# Altium PCB PCB-A6-2x2-V-CUT.PcbDoc
Units mm, origin at the board's own origin, x right, y up, seen from the top; angles counter-clockwise.
Board outline 146.6 x 116.6 mm, 2 copper layers (Top Layer, Bottom Layer); 8 components, 0 nets, 8 pads, 0 vias.
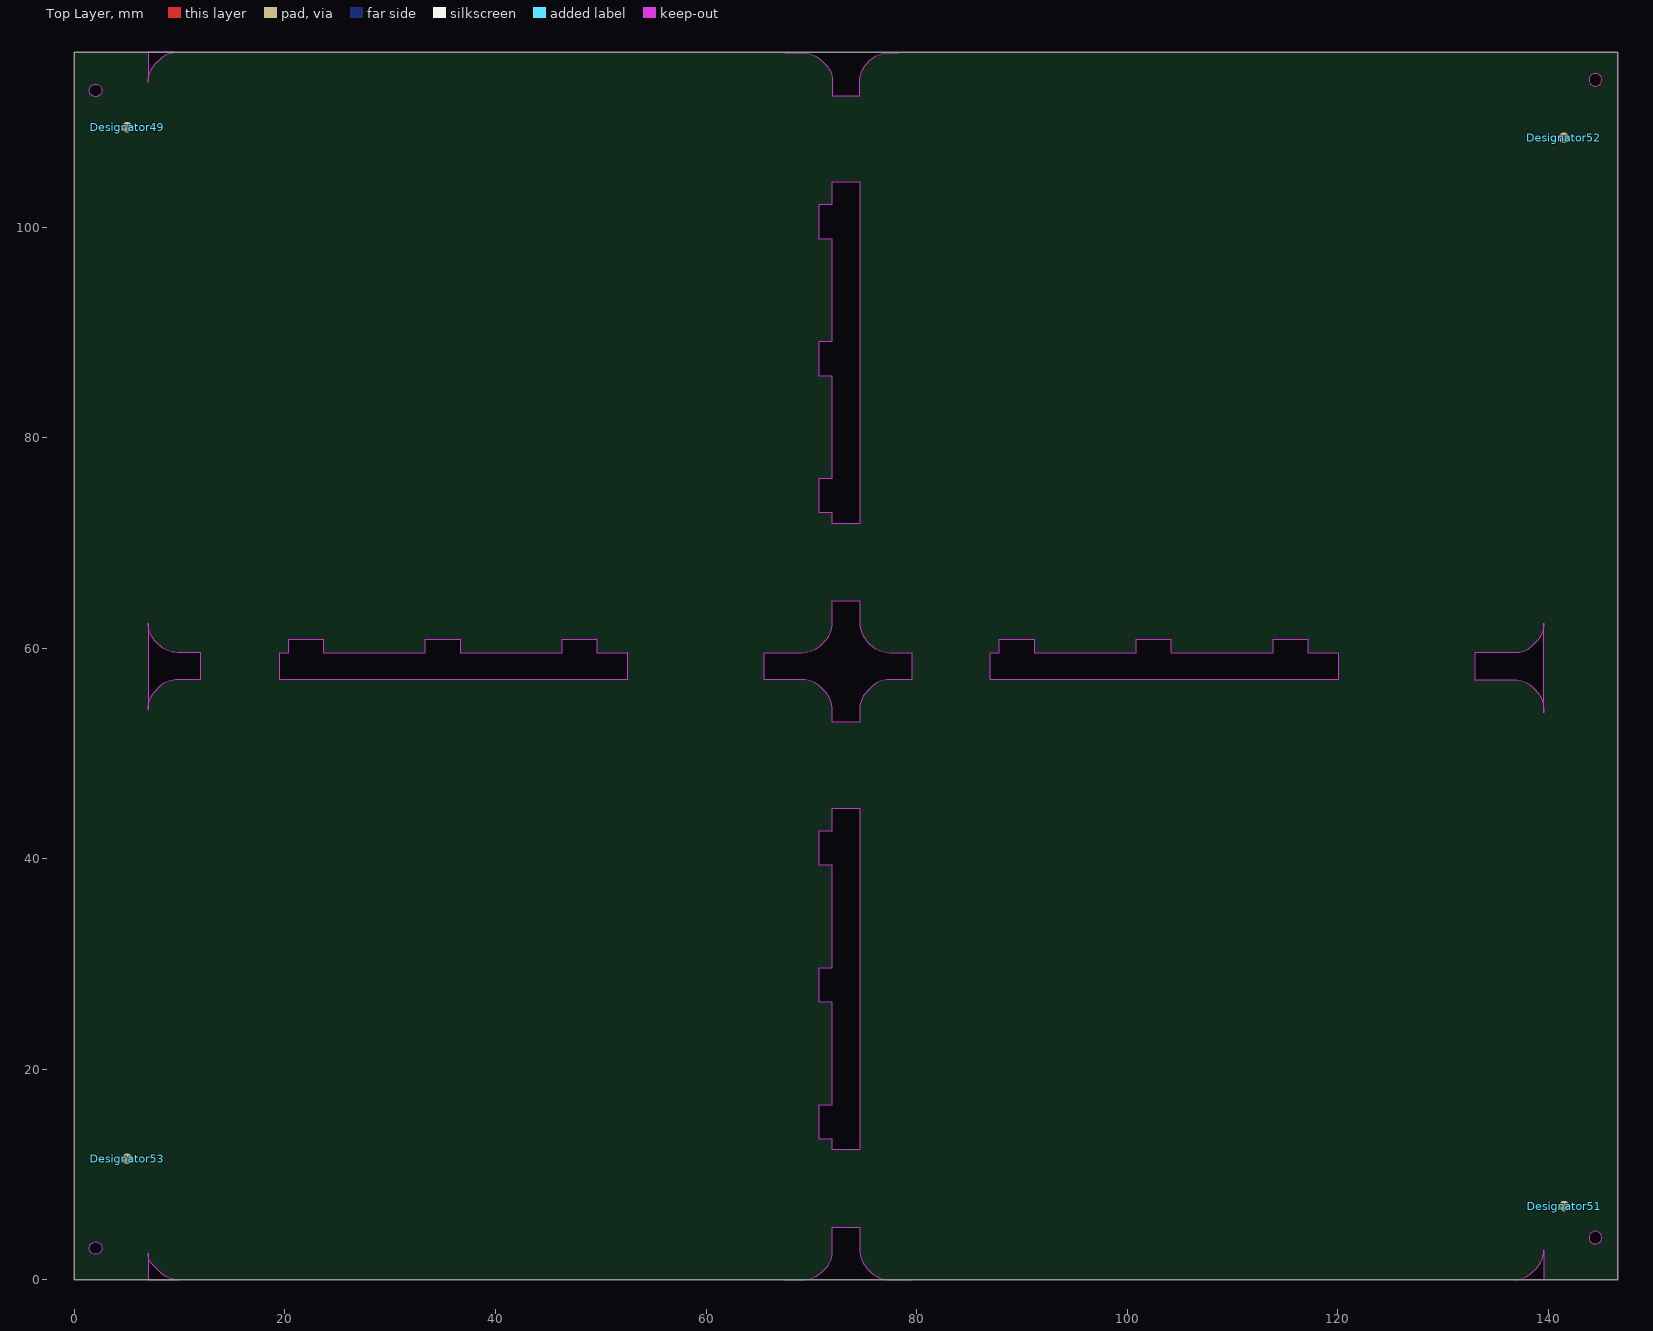
[diagram p0: Top Layer view]
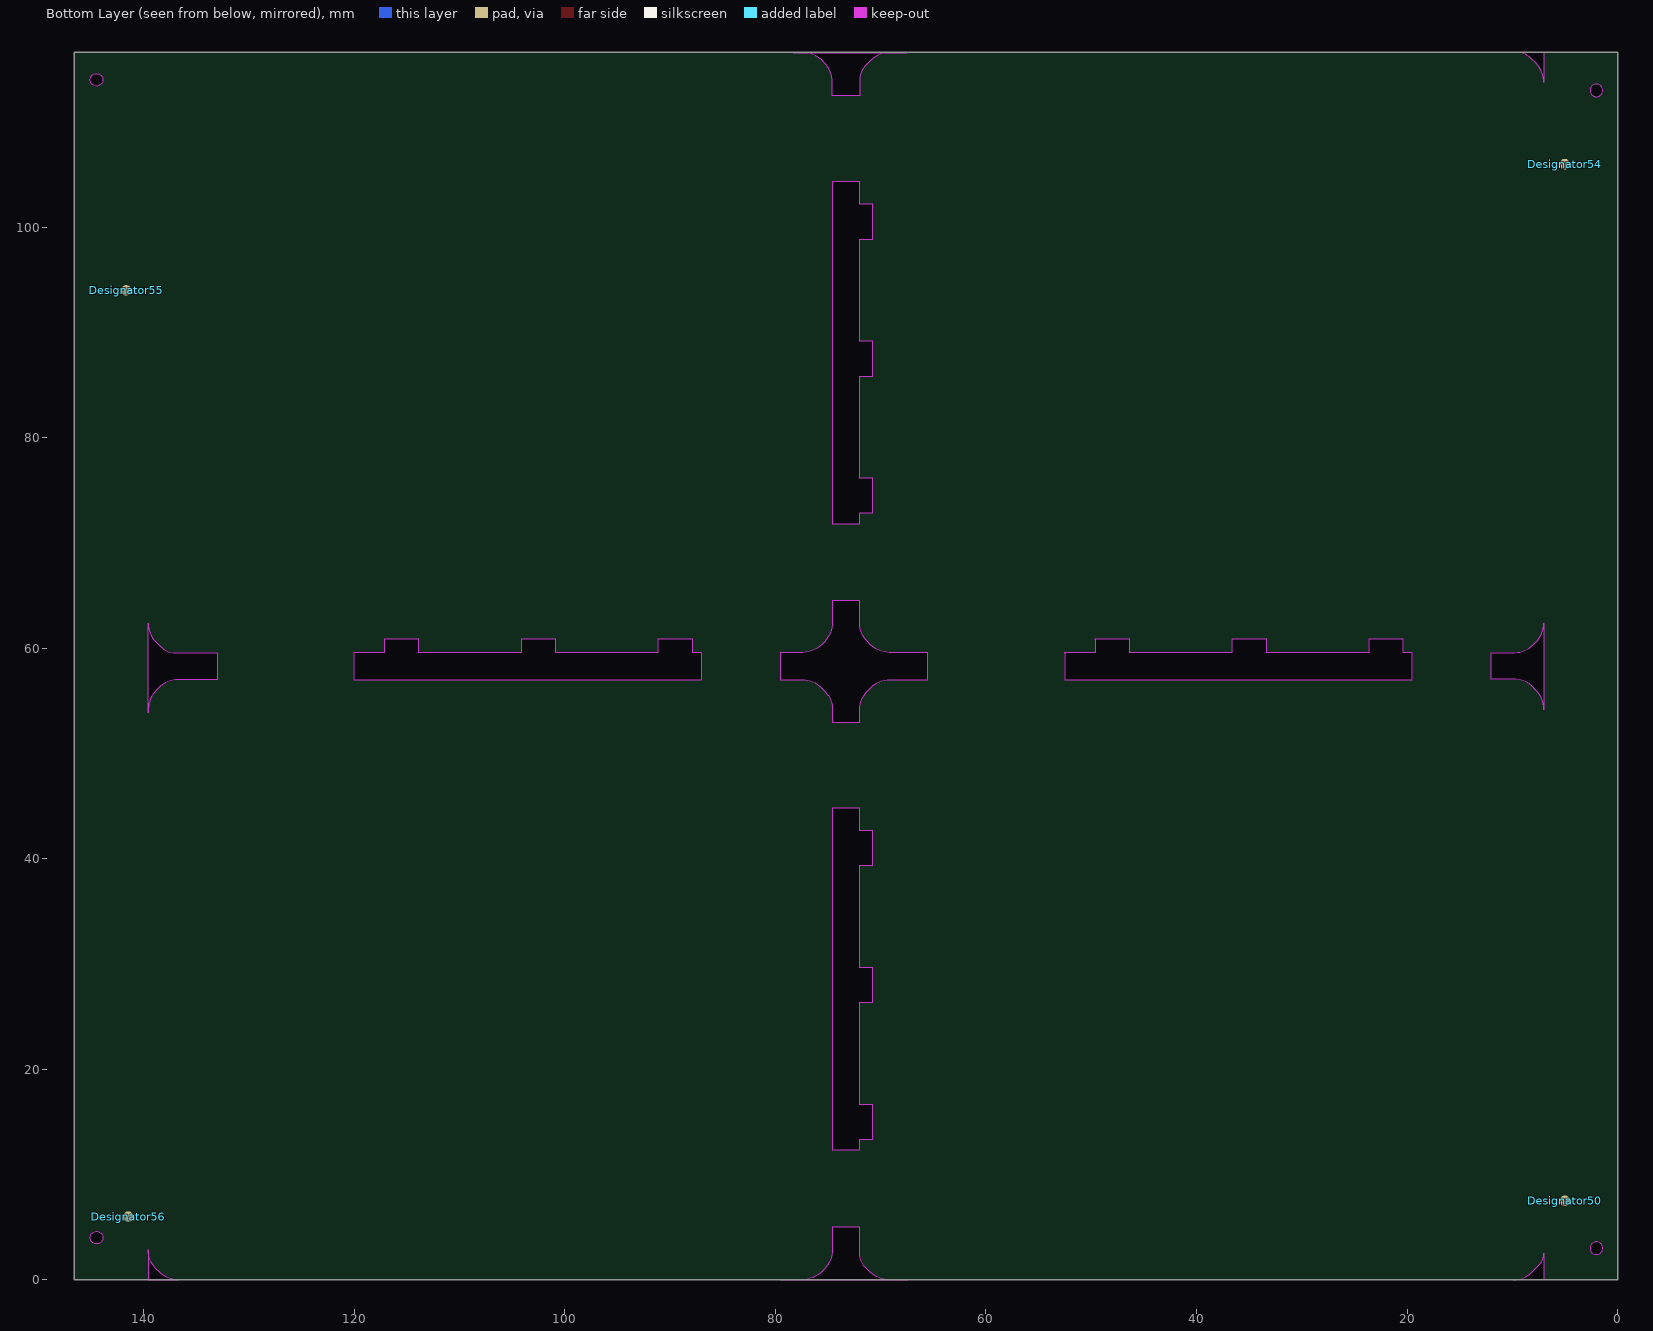
[diagram p1: Bottom Layer view, seen from below]

## Layer stack, top to bottom
Top Solder: solder mask 0.0102, Solder Resist, Dk 3.5
Top Layer: signal copper 0.0356
Dielectric 1: dielectric 0.32, FR-4, Dk 4.8
Bottom Layer: signal copper 0.0356
Bottom Solder: solder mask 0.0102, Solder Resist, Dk 3.5

## Board outline
0,116.6 146.6,116.6 146.6,0 0,0
cut-out: 136.751,0 ccw(c136.751,2.54) 138.547,0.744 138.864,1.061 ccw(c137.088,2.837) 139.6,2.837 139.6,0
cut-out: 7,113.771 cw(c9.54,113.771) 7.744,115.568 8.23,116.054 cw(c9.549,114.735) 9.549,116.6 7,116.6
cut-out: 7,0 9.894,0 cw(c9.894,2.54) 8.098,0.744 7.474,1.368 cw(c8.62,2.513) 7,2.513
cut-out: 67.546,116.599 69.157,116.599 cw(c69.157,114.059) 70.953,115.855 71.401,115.407 cw(c69.969,113.975) 71.995,113.975 71.995,112.489 74.601,112.489 74.601,113.815 cw(c77.141,113.815) 75.345,115.611 75.58,115.846 cw(c77.376,114.05) 77.376,116.59 78.318,116.59
cut-out: 67.441,-0.021 69.191,-0.021 ccw(c69.191,2.519) 70.988,0.723 71.449,1.184 ccw(c70.102,2.531) 72.006,2.531 72.006,4.995 74.591,4.995 74.591,2.842 ccw(c77.131,2.842) 75.335,1.046 75.626,0.754 ccw(c77.422,2.55) 77.422,0.01 79.481,0.01
cut-out: 72,71.834 72,72.851 70.772,72.851 70.764,72.859 70.767,72.863 70.767,76.149 71.999,76.149 72,76.15 71.995,76.156 71.995,85.857 70.769,85.857 70.767,85.855 70.767,89.151 70.766,89.152 70.767,89.153 72.005,89.153 72.005,98.832 ccw(c71.969,98.832) 71.995,98.857 71.988,98.863 70.757,98.863 70.757,102.145 70.771,102.159 71.995,102.159 71.995,104.318 74.601,104.318 74.601,71.873 cw(c74.546,71.873) 74.584,71.834
cut-out: 72.006,12.33 72.006,13.347 70.778,13.347 70.77,13.355 70.773,13.359 70.773,16.645 72.005,16.645 72.006,16.646 72.001,16.652 72.001,26.353 70.775,26.353 70.773,26.351 70.773,29.647 70.772,29.648 70.773,29.649 72.011,29.649 72.011,39.328 ccw(c71.975,39.328) 72.001,39.353 71.994,39.359 70.763,39.359 70.763,42.641 70.777,42.655 72.001,42.655 72.001,44.814 74.607,44.814 74.607,12.369 cw(c74.552,12.369) 74.591,12.33
cut-out: 72,64.499 74.584,64.499 74.584,62.431 ccw(c77.124,62.431) 75.328,60.635 75.627,60.337 ccw(c77.421,62.131) 77.421,59.594 79.536,59.594 79.536,56.998 77.439,56.998 ccw(c77.439,54.458) 75.643,56.254 75.278,55.888 ccw(c76.898,54.268) 74.607,54.268 74.607,52.985 72.001,52.985 72.001,54.143 ccw(c69.461,54.143) 71.257,55.939 70.942,56.254 ccw(c69.146,54.458) 69.146,56.998 65.519,56.998 65.519,59.594 69.187,59.594 ccw(c69.187,62.134) 70.983,60.338 71.256,60.611 ccw(c69.46,62.407) 72,62.407
cut-out: 133.051,59.559 133.055,59.556 133.055,57.012 136.777,57.012 cw(c136.777,54.472) 138.573,56.268 138.828,56.013 cw(c137.032,54.217) 139.572,54.217 139.572,53.874 ccw(c139.528,53.918) 139.591,53.918 139.591,62.381 cw(c137.051,62.381) 138.847,60.585 138.382,60.12 cw(c137.051,61.451) 137.051,59.569 133.056,59.569
cut-out: 87.024,59.592 87.872,59.592 87.872,60.852 87.878,60.859 91.179,60.859 91.179,59.593 91.18,59.592 100.875,59.592 100.876,59.594 100.876,60.834 cw(c100.915,60.834) 100.888,60.862 100.89,60.864 104.177,60.864 104.177,59.597 104.182,59.592 104.183,59.594 113.884,59.594 113.882,59.596 113.882,60.858 117.181,60.858 117.183,60.856 117.174,60.847 117.174,59.594 120.088,59.594 ccw(c120.151,59.53) 120.062,59.53 120.062,56.997 87.107,56.997 cw(c87.107,57.115) 87.024,57.032
cut-out: 19.492,59.592 20.34,59.592 20.34,60.852 20.346,60.859 23.647,60.859 23.647,59.593 23.648,59.592 33.343,59.592 33.344,59.594 33.344,60.834 cw(c33.383,60.834) 33.355,60.862 33.358,60.865 36.645,60.865 36.645,59.597 36.65,59.592 36.651,59.594 46.352,59.594 46.349,59.596 46.349,60.858 49.649,60.858 49.651,60.856 49.642,60.847 49.642,59.594 52.556,59.594 ccw(c52.619,59.53) 52.53,59.53 52.53,56.998 19.575,56.998 cw(c19.575,57.115) 19.492,57.032
cut-out: 7.015,54.149 7.015,54.226 cw(c9.555,54.226) 7.759,56.022 8.17,56.433 cw(c9.616,54.986) 9.616,57.032 12.005,57.032 12.005,59.592 9.784,59.592 cw(c9.784,62.132) 7.988,60.336 7.731,60.593 cw(c9.528,62.389) 6.988,62.389 6.988,54.159 ccw(c7.023,54.159) 6.998,54.134
cut-out: 2,2.4 cw(c2,3) 1.4,3 cw(c2,3) 2,3.6 cw(c2,3) 2.6,3 cw(c2,3)
cut-out: 143.9,114 ccw(c144.5,114) 144.5,113.4 ccw(c144.5,114) 145.1,114 ccw(c144.5,114) 144.5,114.6 ccw(c144.5,114)
cut-out: 143.9,4 ccw(c144.5,4) 144.5,3.4 ccw(c144.5,4) 145.1,4 ccw(c144.5,4) 144.5,4.6 ccw(c144.5,4)
cut-out: 2,112.4 cw(c2,113) 1.4,113 cw(c2,113) 2,113.6 cw(c2,113) 2.6,113 cw(c2,113)

## Design rules (kind name [scope] priority, off if disabled: settings)
Clearance [All] p1: gap=0.254 ignorepadtopadclearanceinfootprint=FALSE except(0: Arc-Hole Track-Hole SMDPad-Hole THPad-Hole Via-Hole Fill-Hole Poly-Hole Region-Hole Text-Hole)
PolygonConnect [All] p1: connectstyle=Relief reliefconductorwidth=0.254 reliefentries=4 polygonreliefangle="90 Angle" airgapwidth=0.254
RoutingVias [All] p1: holewidth=0.711 width=1.27 viastyle="Through Hole" minholewidth=0.711 minwidth=1.27 maxholewidth=0.711 maxwidth=1.27
SolderMaskExpansion [All] p1: expansion=0.102 istentingtop=FALSE
Width [All] p1: maxlimit=0.254 minlimit=0.254 preferedwidth=0.254
30 further rules are at their usual default settings.

## Components (designator, comment, footprint, x,y, rotation, side; value= is the part's Value field where it differs from the comment)
Designator49 "Comment" FID10-20#1 5,109.5 r0 top
Designator50 "Comment" FID10-20#2 5,7.5 r0 top
Designator51 "Comment" FID10-20#1 141.529,6.997 r0 top
Designator52 "Comment" FID10-20#1 141.5,108.5 r0 top
Designator53 "Comment" FID10-20#1 5,11.5 r0 top
Designator54 "Comment" FID10-20#1 5,106 r180 bottom
Designator55 "Comment" FID10-20#1 141.695,94 r180 bottom
Designator56 "Comment" FID10-20#1 141.5,6 r180 bottom

## Footprints (in the part's own frame and the unit in brackets; to place one, negate y for a bottom-side part, rotate by r counter-clockwise, add the part's x,y. Pads: shape width x height; smd on the part's side, far side on the other; paste and mask are expansions set on the pad)
FID10-20#1 [mm] "Fiducial mark.  There is nothing to buy or mount."
  round 1 smd mask+0.5: 1(0,0)
  Top Layer pour cut-out: 0,-1 -0.383,-0.924 -0.707,-0.707 -0.924,-0.383 -1,0 -1,0 -0.924,0.383 -0.707,0.707 -0.383,0.924 0,1 0,1 0.383,0.924 0.707,0.707 0.924,0.383 1,0 1,0 0.924,-0.383 0.707,-0.707 0.383,-0.924 0,-1
FID10-20#2 [mm] "Fiducial mark.  There is nothing to buy or mount."
  round 1 smd far side mask+0.5: 1(0,0)
  Top Layer pour cut-out: 0,-1 -0.383,-0.924 -0.707,-0.707 -0.924,-0.383 -1,0 -1,0 -0.924,0.383 -0.707,0.707 -0.383,0.924 0,1 0,1 0.383,0.924 0.707,0.707 0.924,0.383 1,0 1,0 0.924,-0.383 0.707,-0.707 0.383,-0.924 0,-1

## Nets (pads, with @x,y where several pads share a name; then routed paths per layer and width w, separated by ;. In a path a pad name is that pad's centre, name@x,y a point inside that pad or via, vN(x,y) a via of type N, cw(c..) or ccw(c..) an arc to the next point about the centre after c; other vN are vias at no path point)
pads on no net: Designator49.1 Designator50.1 Designator51.1 Designator52.1 Designator53.1 Designator54.1 Designator55.1 Designator56.1

## Silkscreen, mask and mechanical layers (free items; w line width, h text height)
Board Outline:
  circle w0.2: c2,3 r0.6
  circle w0.2: c144.5,4 r0.6
  circle w0.2: c144.5,114 r0.6
  circle w0.2: c2,113 r0.6
  pour cut-out: 136.788,116.6 cw(c136.788,114.06) 138.584,115.856 138.856,115.584 cw(c137.06,113.788) 139.6,113.788 139.6,116.6
  lines w0.2: -4.7,57.032 -1.064,57.032 ; -4.7,59.592 -1.064,59.592 ; -1.611,56.528 -1.064,57.032 ; -1.611,57.526 -1.064,57.032 ; -1.611,59.088 -1.064,59.592 ; -1.611,60.086 -1.064,59.592 ; 6.496,117.597 7,117.05 ; 7,120.686 7,117.05 ; 7.494,117.597 7,117.05 ; 12.002,59.592 12.005,59.592 12.005,57.032 ; 19.492,57.032 19.492,59.592 19.503,59.592 ; 52.53,56.998 52.53,59.594 52.556,59.594 ; 65.519,56.998 65.519,59.594 67.228,59.594 ; 71.491,118.288 71.995,117.74 ; 71.995,104.318 74.601,104.318 ; 71.995,112.489 74.601,112.489 ; 71.995,121.377 71.995,117.74 ; 72.001,44.814 74.607,44.814 ; 72.001,52.985 74.607,52.985 ; 72,64.499 74.584,64.499 ; 72,71.834 74.584,71.834 ; 72.006,4.995 74.591,4.995 ; 72.006,12.33 74.591,12.33 ; 72.488,118.288 71.995,117.74 ; 74.097,118.288 74.601,117.74 ; 74.601,121.377 74.601,117.74 ; 75.094,118.288 74.601,117.74 ; 79.496,59.594 79.536,59.594 ; 79.536,56.998 79.536,59.558 ; 87.023,56.998 87.023,59.558 ; 120.058,59.559 120.077,59.559 120.077,57.089 ; 133.051,56.963 133.051,59.559 ; 139.096,118.275 139.6,117.727 ; 139.6,121.363 139.6,117.727 ; 140.094,118.275 139.6,117.727 ; 0,0 7,0 7,116.6 0,116.6 0,0 ; 139.6,0 139.6,116.6 146.6,116.6 146.6,0 139.6,0
  text "V-CUT" at 72.81,122.13 h3 r90
  text "V-CUT" at 75.416,122.13 h3 r90
  text "V-CUT" at 140.415,122.117 h3 r90
  text "V-CUT" at 7.815,121.44 h3 r90
  text "CNC" at 74.108,90.924 h2.54 r90
  text "V-CUT" at -12.374,58.777 h3
  text "CNC" at 8.17,57.685 h2.54
  text "CNC" at 105.458,57.685 h2.54
  text "CNC" at 136.186,57.685 h2.54
  text "CNC" at 27.347,57.558 h2.54
  text "CNC" at 74.337,57.05 h2.54 r90
  text "V-CUT" at -12.374,56.217 h3
  text "CNC" at 74.083,32.539 h2.54 r90

## Panel: embedded boards
"PCB_A6O.pcbdoc" at 7,0, 2 rows x 2 columns, spacing 59.6 x 67.6, rotation 0